# Altium PCB PCB.PcbDoc (part 2 of 4)
Units mm, origin at the board's own origin, x right, y up, seen from the top; angles counter-clockwise.
Board outline 86.25 x 140 mm, 4 copper layers (Top Layer, GND, PWR, Bottom Layer), stack 1.57 mm thick; 308 components, 255 nets, 1064 pads, 1223 vias.
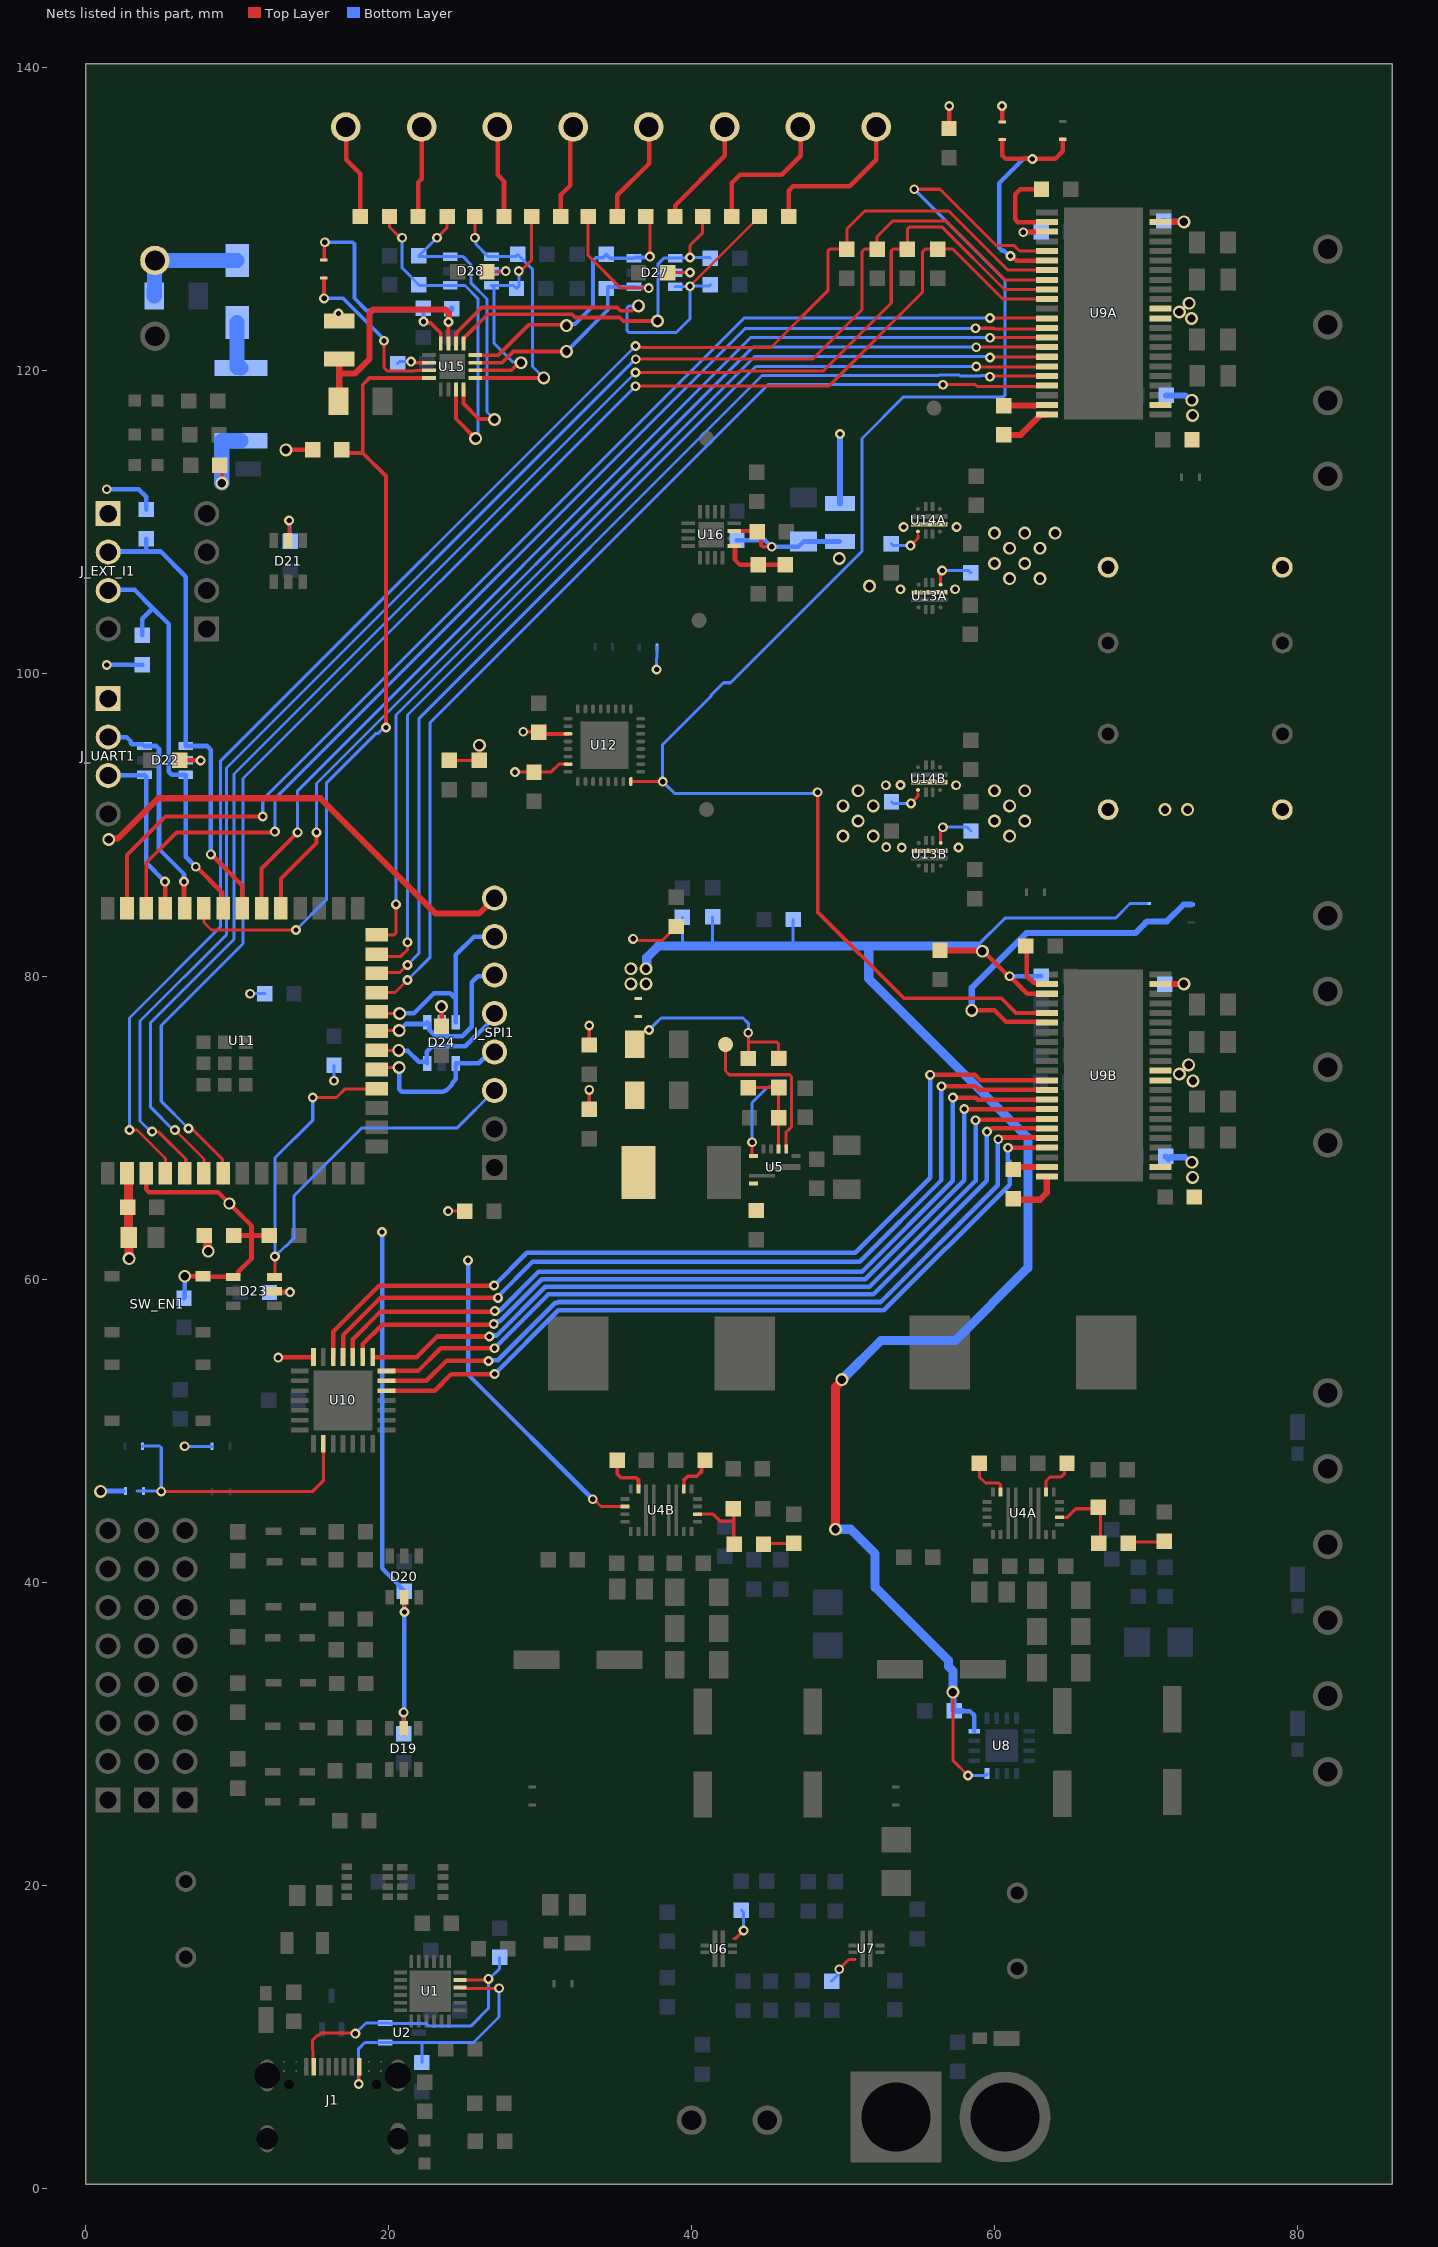
[diagram p4: the nets of this part, all layers, seen from the top]

## Part data
C1 C2 C9A C9B: library part C_10uF_25V, "Ceramic capacitor", Dielectric=X5R, Tolerance=10%, Voltage=25V, Casing=0805, Technology=Ceramic
C3 C31 C35A C35B C38A C38B C39 C47 C52 C53 C60 C61 C62 C66 C68 C69: library part C_1uF_10V, "Ceramic capacitor", Dielectric=X7R, Tolerance=10%, Voltage=10V, Casing=0603, Technology=Ceramic
C4 C19 C40 C41 C46 C63 C64 C67 C*3: library part C_100nF_10V, "Ceramic capacitor", Dielectric=X7R, Tolerance=10%, Voltage=10V, Casing=0603, Technology=Ceramic
C5 C6A C6B C7A C7B C22 C37A C37B C43 C44 C48 C49 C50 C51: library part C_100nF_25V, "Ceramic capacitor", Dielectric=X7R, Tolerance=10%, Voltage=25V, Casing=0603, Technology=Ceramic
C8A C8B C16A C16B C17A C17B: library part C_Pol_100uF_25V, "Aluminum Organic Polymer Capacitors 25Vol 100uF SMD 2KHr ESR=36 mOhms AECQ200", Manufacturer=KEMET, Tolerance=20%, Voltage=25V, ComponentLink1Description=Datasheet, ComponentLink1URL=https://yageogroup.com/content/datasheet/asset/file/KEM_A4088_A768, ComponentLink2Description=Supplier, ComponentLink2URL=https://www.digikey.pl/pl/products/detail/kemet/A768EB107M1ELAS036/13420071
C10A C10B C13A C13B C33A C33B C54A C54B C57A C57B: library part C_1uF_25V, "Ceramic capacitor", Dielectric=XR7, Tolerance=10%, Voltage=25V, Casing=0603, Technology=Ceramic
C11A C11B: library part C_220nF_25V, "Ceramic capacitor", Dielectric=XR7, Tolerance=10%, Voltage=25V, Casing=0603, Technology=Ceramic
C12A C12B C14A C14B C15A C15B C21 C30: library part C_22uF_25V, "Ceramic capacitor", Dielectric=X7R, Tolerance=20%, Voltage=25V, Casing=1206, Technology=Ceramic
C18A C18B C*2A C*2B: library part C_4u7_16V, "Ceramic capacitor", Dielectric=X5R, Tolerance=10%, Voltage=16V, Casing=0603, Technology=Ceramic
C20 C*1A C*1B: library part C_120pF_10V, "Ceramic capacitor", Dielectric=XR7, Tolerance=10%, Voltage=10V, Casing=0603, Technology=Ceramic
C23 C24 C59 C65: library part C_22uF_10V, "Ceramic capacitor", Dielectric=X5R, Tolerance=20%, Voltage=10V, Casing=1206, Technology=Ceramic
C25 C32A C32B C42 C56A C56B: library part C_Pol_470uF_35V, "470 µF 35 V Aluminum Electrolytic Capacitors Radial, Can 2000 Hrs @ 105°C", Manufacturer=Rubycon, Tolerance=20%, Voltage=35V
C26 C27 C28 C29: library part C_22nF_25V, "Ceramic capacitor", Dielectric=X5R, Tolerance=10%, Voltage=25V, Casing=0603, Technology=Ceramic
C34A C34B C36A C36B: library part Cap_10nF, "Ceramic capacitor", Dielectric=X7R, Tolerance=5%, Voltage=35V, Casing=0603
C45: library part C_10uF_10V, "Ceramic capacitor", Dielectric=X5R, Tolerance=10%, Voltage=10V, Casing=0805, Technology=Ceramic
C55A C55B C58A C58B: library part C_3n3F_25V, "Ceramic capacitor", Dielectric=XR7, Tolerance=10%, Voltage=25V, Casing=0603, Technology=Ceramic
D1 D2 D6 D7 D8 D9 D10: library part TVS_22V, "22V Breakdown MSMP20A-M3/89A", ComponentLink1Description=Datasheet, ComponentLink1URL=https://www.bourns.com/docs/product-datasheets/smbj.pdf, ComponentLink2Description=Supplier, ComponentLink2URL=https://www.mouser.pl/ProductDetail/Bourns/SMBJ22A?qs=%252Bf8Cd6aE5bxYX21zv65pDQ%3D%3D
D3 D4 D25 D26: library part LED_0603, "LED RED 0603 3.3V", Casing=0603, Color=RED
D5: library part "D schottky 1.5A", "Schottky Diode 1500mA 30V reverse", Reverse standoff voltage=20V, Casing="SMA (DO-214AC)", VFm=380mV@1000mA
D11 D12 D13 D14 D15 D16 D17 D18: library part "D schottky 200mA", "Schottky Diode 200mA 30V reverse", Power=150mW, Reverse standoff voltage=30V, Casing=SOD-323, VFm=280mV@10mA
D19 D20: "Very low capacitance ESD protection", Manufacturer_Name=STMicroelectronics, Copyright="Copyright (C) 2025 Ultra Librarian. All rights reserved.", Manufacturer_Part_Number=USBLC6-4SC6, RefDes=RefDes, Type=Type
D21 D22 D23 D24 D27 D28: "Very low capacitance ESD protection", Manufacturer=STMicroelectronics, Manufacturer_Part_Number=USBLC6-4SC6
EN_VREG1 EN_VREG2 JP1A JP1B JP2A JP2B JP3 JP4 JP5 JP6 JP7 OUT_1 OUT_PD1 PWM_1 PWM_2 PWM_3 PWM_REG1: library part "Jumper x2", "Jumper on traces"
F1: library part "PTC 1.1A FUSE", "FUSE PTC 1.1A 8VDC 2.2A TRIP"
F_ST1 F_USB1 F_XT1: library part F_7A, "7A fuse 0603 package", Current=7A, Manufacturer="Bel fuse Inc."
FB1A FB1B FB2A FB2B FB3A FB3B FB4A FB4B: library part FerriteBead_8A5, "Ferrite bead", Manufacturer="Bourns Inc."
J1: "USB - C connector  16 pin, 100W, famale paraller to board", Manufacturer="Global Connector Technology", Power=100W, Manufacturer_Part_Number=USB4105-GF-A-120.
J_1 J_EXT_2 J_IN_1 J_IN_2 J_IN_3 J_IN_4 J_SUP1 J_VREG1 J_VREG2 OUT_A1A OUT_A1B OUT_B1A OUT_B1B: library part "Screw Terminal x2 5mm", "Screw terminal x2 5mm spacing", Manufacturer="Same Sky", MP=TB001-500-02BE
J_EXT_1: library part XT60, "XT60 male connector, ewentualnie dostępny w zasobach prywatnych (5szt)", Manufacturer=AMASS
J_EXT_I1 J_MISC1 J_UART1: library part Goldpin_array_4, "Goldpin Male 4"
J_PWM_GND1 J_PWM_S1 J_PWM_VSUP1 J_SPI1: library part Goldpin_array_8, "Goldpin Male 8"
L1A L1B: library part L_4u7_10.5A, "Inductor, 4.7 uF , 10A", Manufacturer="Bourns Inc.", Tolerance=20%, IDC=10A
L2 L3: library part L_1mH, "Inductor", Tolerance=20%, Casing=1007, IDC=15mA
L_1: library part L_2u2_4.76A_1, "Inductor, 2.2uF 4.76A", Manufacturer="EATON ELECTRONICS", Tolerance=20%, ComponentLink1Description=Datasheet, ComponentLink1URL=https://www.eaton.com/content/dam/eaton/products/electronic-components/resources/data-sheet/eaton-dr-high-power-density-high-efficiency-shielded-drum-core-power-inductors-data-sheet.pdf, ComponentLink2Description=Supplier, ComponentLink2URL=https://www.digikey.pl/pl/products/detail/eaton-electronics-division/DR74-2R2-R/667219, IDC=7.06A
Q1 Q2: library part NMOS_DMG7430LFG, "DMG7430LFG, N-mosfet", Manufacturer="Diodes Incorporated", Casing=8-PowerVDFN
R1: library part R_27R, "Resistor", Power=100mW, Tolerance=1%, Casing=0603
R2 R18 R23: library part R_604R, "Resistor", Power=100mW, Tolerance=1%, Casing=0603
R3: library part R_NTC_10k_25C, "NTC Thermistor, 10k", Tolerance=1%, Casing=0603
R4 R5 R12 R51 R52: library part R_1k, "Resistor", Power=100mW, Tolerance=1%, Casing=0603
R6 R11 R13 R28A R28B R29 R38 R39 R40 R41 R42 R43 R44 R45 R50 R53 R54 R57 R74 R75 R76: library part R_10k, "Resistor", Power=100mW, Tolerance=1%, Casing=0603
R7A R7B R16 R20: library part R_100k, "Resistor", Power=100mW, Tolerance=1%, Casing=0603
R8A R8B R9A R9B: library part R_10R, Power=100mW, Tolerance=1%, Casing=0603
R10 R*2A R*2B: library part R_48k7, "Resistor", Power=100mW, Tolerance=1%, Casing=0603
R14 R19: library part R_470k, "Resistor", Power=100mW, Tolerance=1%, Casing=0603
R15 R21: library part R_169k, "Resistor", Power=100mW, Tolerance=1%, Casing=0603
R17 R22: library part R_100R, "Resistor", Power=100mW, Tolerance=1%, Casing=0603
R24A R24B R25A R25B R26A R26B R27A R27B R46 R47: library part R_3k09, "Resistor", Power=100mW, Tolerance=1%, Casing=0603
R30 R31 R32 R33 R34 R35 R36 R37: library part R_220R, "Resistor", Power=100mW, Tolerance=1%, Casing=0603
R48 R49 R_CC2 RCC1: library part R_5k1, "Resistor", Power=100mW, Tolerance=1%, Casing=0603
R55A R55B R56A R56B: library part R_549, Power=100mW, Tolerance=1%, Casing=0603
R58 R59 R60 R61 R70 R71 R72 R73: library part R_51k_LT, Power=100mW, Tolerance=0.1%, Casing=0603
R62 R63 R64 R65 R66 R67 R68 R69: library part R_10k_LT, Power=125mW, Tolerance=0.1%, Casing=0603
R*1A R*1B: library part R_27k4, "Resistor", Power=100mW, Tolerance=1%, Casing=0603
R_S1A R_S1B R_S2: library part R_10mR, "Shunt Resistor 10 mR, 1206, 250mW", Power=250mW, Tolerance=1%, Casing=1206
R_SUSB1: library part R_5mR, "Shunt Resistor 5mR, 0805", Power=500mW, Tolerance=1%, Casing=0805
SW_EN1 SW_IO1: library part Button, "NO button", Manufacturer="C&K Components", Manufacturer_Part_Number="PTS526 SM15 SMTR2 LFS"
U1: "USB_C PD controller", Manufacturer="Diodes Inc", Manufacturer_Part_Number=AP33772SDKZ-13
U2 U3: "Dual 1.5-pF, 5.5-V, ±25-kV  ESD protection diode with 5.5-A 8/20-uS surge rating  for USB 2.0 3-SC70", Manufacturer="Texas Instruments", Manufacturer_Part_Number=TPD2E2U06DCKR
U4A U4B: "30-V, 8-A buck-boost converter with I2C interface", Manufacturer="Texas Instruments", ComponentLink1Description=Datasheet, ComponentLink1URL=https://www.ti.com/lit/ds/symlink/tps55289.pdf, ComponentLink2Description=Supplier, ComponentLink2URL=https://www.digikey.pl/pl/products/detail/texas-instruments/TPS55289RYQR/16928303?s=N4IgTCBcDaIC4AcDOBWFYAcBOASgTwEcAnEAXQF8g, ComponentLink3Description=Supplier, ComponentLink3URL=https://www.mouser.pl/ProductDetail/Texas-Instruments/TPS55289RYQR?qs=T%252BzbugeAwjhgaIN94Lbpjg%3D%3D&utm_id=20109199562&utm_source=google&utm_medium=cpc&utm_marketing_tactic=emeacorp, Manufacturer_Part_Number=TPS55289RYQR
U5: "Switching Voltage Regulators 4.5-V to 28-V input 8-A synchronous buck", Manufacturer="Texas Instruments", Manufacturer_Part_Number=TPS56837RPAR
U6 U7: "2.7-V to 23-V, 5.5-A eFuse with integrated reverse polarity protection 10-VQFN-HR", Manufacturer="Texas Instruments", Manufacturer_Part_Number=TPS259474LRPWR
U8: "26V, triple channel, 13-bit, i2c output current/voltage monitor w/alerts 16-VQFN", Manufacturer="Texas Instruments", Datasheet=https://www.ti.com/lit/gpn/ina3221, Manufacturer_Part_Number=INA3221AIRGVR
U9A U9B: library part IC_drv8962_PDRV8962DDWR, "65-V four-channel half-bridge driver with current sense outputs 44-HTSSOP", Manufacturer="Texas Instruments", Manufacturer_Part_Number=DRV8962DDWR
U11: "Bluetooth, WiFi 802.11b/g/n, Bluetooth v5.0 Transceiver Module 2.4GHz Antenna Not Included, U.FL Surface Mount", Package=None, Availability=Unavailable, Check_prices=https://www.snapeda.com/parts/ESP32-S3-WROOM-1U-N16R8/Espressif+Systems/view-part/?ref=eda, MF="Espressif Systems", MP=ESP32-S3-WROOM-1U-N16R8, Price=None, SnapEDA_Link=https://www.snapeda.com/parts/ESP32-S3-WROOM-1U-N16R8/Espressif+Systems/view-part/?ref=snap
U12: library part IC_tca6424a_TCA6424ARGJR, "24-bit translating 1.65- to 5.5-V I2C/SMBus I/O expander with interrupt, reset & config registers 32-UQFN -40 to 85", Manufacturer="Texas Instruments", Manufacturer_Part_Number=TCA6424ARGJR, PackageReference=RGJ0032A, PartNumber=TCA6424ARGJR
U13A U13B U14A U14B: "Ideal diode ORing controller 5.5A 23V", Manufacturer="Texas Instruments"
U15: library part IC_ads7128_ADS7128IRTER, "Small 8-ch 12-bit analog-to-digital converter (ADC) with I2C interface, GPIOs, CRC and RMS module 16-WQFN -40 to 85", Manufacturer_Name="Texas Instruments", Copyright="Copyright (C) 2026 Ultra Librarian. All rights reserved.", Datasheet=https://www.ti.com/lit/gpn/ads7128, Manufacturer_Part_Number=ADS7128IRTER, RefDes=RefDes, Type="Data Acquisition"
U16: "DAC53202RTER", Manufacturer="Texas Instruments"

## Via types
v1: diameter 0.85, hole 0.55, Top Layer to Bottom Layer, tented both sides, 772 vias
v2: diameter 0.65, hole 0.35, Top Layer to Bottom Layer, tented both sides, 362 vias
v3: diameter 0.65, hole 0.35, Top Layer to Bottom Layer, tented bottom, 26 vias
v4: diameter 0.7, hole 0.4, Top Layer to Bottom Layer, tented both sides, 25 vias
v5: diameter 0.65, hole 0.35, Top Layer to Bottom Layer, tented top, 19 vias
v6: diameter 0.85, hole 0.55, Top Layer to Bottom Layer, tented bottom, 14 vias
v7: diameter 5, hole 4.5, Top Layer to Bottom Layer, 4 vias
v8: diameter 0.8, hole 0.5, Top Layer to Bottom Layer, tented both sides, 1 vias

## Nets (pads, with @x,y where several pads share a name; then routed paths per layer and width w, separated by ;. In a path a pad name is that pad's centre, name@x,y a point inside that pad or via, vN(x,y) a via of type N, cw(c..) or ccw(c..) an arc to the next point about the centre after c; other vN are vias at no path point)
3V3PROT: C30.2 D5.K J_1.1 J_EXT_I1.1 J_SPI1.8 J_UART1.1 R48.2 R49.2 | length 44
  Top Layer w0.4: v1(1.537,89.029) 1.591,89.083 2.133,89.083 4.8,91.75 15.5,91.75 23.119,84.131 25.971,84.131 J_SPI1.8@27,85.16
  Bottom Layer w0.3: v2(1.4,100.55) 1.425,100.575 R49.2@3.75,100.575 ; v2(1.4,112.15) 3.5,112.15 4,111.65 R48.2@4,110.812
  Bottom Layer w1: C30.2@4.539,124.906 4.539,125.282 4.563,125.306 4.563,127.25 J_1.1@4.581,127.25 D5.K@10,127.25
3V5: C31.2 C35A.2 C35B.2 C40.2 C41.2 C44.2 C45.2 C46.2 C48.2 C49.2 C50.2 C52.2 C53.2 C60.2 C63.2 C64.2 D6.K D19.5 D20.5 D21.5 D22.5 D23.5 D24.5 D27.5 D28.5 F1.2 JP1A.1 JP1B.1 JP3.2 L2.1 L3.1 OUT_1.2 PWM_1.1 PWM_2.2 R7A.2 R7B.2 R12.2 R16.2 R20.2 R28A.1 R28B.1 R29.2 R46.2 R47.2 R50.2 R53.2 R54.2 R57.2 R75.1 R76.2 U4B.2 U8.4 U8.16 U9A.25 U9B.25 U10.21 U11.2 U12.27 U12.31 U15.10 | length 252.6
  Top Layer w0.2: R12.2@8.675,113.75 9,113.425 v1(9,112.55) ; D21.5@13.375,108.762 13.439,108.827 v2(13.439,110.082) ; D19.5@21,30.362 v2(21,31.413) ; D20.5@21.04,39.018 21.046,39.012 21.046,38.048 v2(21.052,38.042) ; v2(23.938,64.5) R29.2@25.038,64.5 ; R54.2@24,94.25 R53.2@26,94.25 ; C64.2@26.5,126.5 27.691,126.5 v5(27.738,126.546) ; v2(28.35,93.475) C53.2@29.6,93.475 29.625,93.5 30.75,93.5 31.25,94 U12.31@31.85,94 ; R16.2@33.25,71.212 v2(33.25,72.505) ; R20.2@33.25,75.462 v2(33.25,76.75) ; v2(33.485,45.485) 33.541,45.485 34.025,45 U4B.2@35.6,45 ; v2(36.149,82.47) 36.235,82.384 36.483,82.384 36.492,82.376 38.088,82.376 R76.2@39,83.288 ; C63.2@38.425,126.45 v3(39.9,126.45) ; v1(57.25,32.75) 57.25,28.25 v2(58.25,27.25)
  Top Layer w0.25: v2(21.49,120.573) 21.56,120.502 22.677,120.502 U15.10@22.679,120.5 ; v2(28.893,96.144) 29.882,96.144 30.026,96 U12.27@31.85,96
  Top Layer w0.3: U11.2@2.735,67 U11.2@2.85,66.885 ; C48.2@6.212,94.254 6.216,94.25 v2(7.6,94.25) ; D23.5@12.475,59.2 12.5,59.175 13.475,59.175 v2(13.5,59.15) ; v2(12.725,54.826) 12.766,54.867 U10.21@15.05,54.867 ; v1(13.225,114.75) R57.2@15,114.75 ; C50.2@23.496,76.712 23.5,76.716 v1(23.5,77.998) ; R53.2@26,94.25 v1(26,95.25) ; R28A.1@57,135.962 57.016,135.978 v2(57.016,137.451) ; v1(59.2,81.65) 59.275,81.65 60.925,80 v2(61,80) 62.152,78.848 U9B.25@63.45,78.848 ; v2(60.5,137.45) 60.513,137.438 JP1A.1@60.513,136.45 ; v2(61.9,129.108) 61.92,129.128 63.43,129.128 U9A.25@63.45,129.148
  Top Layer w0.4: v2(16.7,123.75) 16.7,123.1 L2.1@16.75,123.05 ; R28B.1@56.4,81.712 59.138,81.712 v1(59.2,81.65)
  Top Layer w0.6: U11.2@2.85,66.885 C45.2@2.85,62.75 2.863,62.737 2.863,61.378 v1(2.876,61.364) ; R50.2@7.85,62.89 8.05,62.69 8.05,61.898 v1(8.098,61.85) ; v1(49.5,43.5) 49.5,52.882 49.925,53.307 v1(49.925,53.375)
  Bottom Layer w0.2: v2(6.541,48.975) PWM_1.1@8.35,48.975 ; v2(10.867,78.85) R47.2@11.838,78.85 ; C44.2@13.504,108.712 v2@13.504,110.146 ; v2(16.4,73.102) R46.2@16.4,74.125 ; C60.2@20.6,120.45 20.723,120.573 v2(21.49,120.573) ; D28.5@26.8,126.55 26.802,126.548 v5(27.738,126.546) v5(27.738,126.546) ; v2(37.7,100.25) 37.7,101.004 37.725,101.029 JP3.2@37.725,101.725 ; D27.5@38.925,126.45 v3(39.9,126.45) ; 39.3,81.993 39.4,82.093 R7B.2@39.4,83.888 ; 41.4,81.993 R7A.2@41.4,83.925 ; R75.1@46.712,83.75 46.712,82.031 46.75,81.993 ; v2(58.25,27.25) 59.452,27.25 59.504,27.303 U8.16@59.504,27.379 ; v1(59.2,81.65) 58.857,81.993 58.857,82.007 60.7,83.85 68,83.85 68.95,84.8 JP1B.1@70.025,84.8
  Bottom Layer w0.3: v1(1,46) 1.025,46.025 2.475,46.025 ; D22.5@6.612,94.25 v2(7.6,94.25) ; C49.2@12.145,59.129 13.279,59.129 13.3,59.15 v2(13.5,59.15) ; v2(19.575,63.124) 19.575,40.925 20.678,39.822 20.678,39.776 21.052,39.402 v2(21.052,38.042) 21.026,38.016 21.026,31.439 v2(21,31.413) C40.2@21,30 ; D24.5@23.5,76.975 v1(23.5,77.998) ; v2(25.25,61.25) 25.25,53.719 v2(33.485,45.485) ; v1(49.925,53.375) v1@50,53.45 ; 57.902,31.5 58.383,31.5 58.654,31.229 U8.4@58.654,30.179 ; v2(61,80) C35B.2@63.075,80 ; v2(61.9,129.108) 63.033,129.108 C35A.2@63.075,129.15
  Bottom Layer w0.4: L3.1@49.8,111.2 v2(49.8,115.8) ; v1(57.25,32.75) 57.291,32.709 57.291,31.563 57.353,31.5 57.902,31.5
  Bottom Layer w0.6: v1(37,80.5) 37.048,80.548 37.048,81.236 37.805,81.993 39.3,81.993 41.4,81.993 46.75,81.993 51.7,81.993 ; v1(49.5,43.5) 50.5,43.5 52.125,41.875 52.125,39.675 56.952,34.848 56.952,34.452 57.25,34.154 v1(57.25,32.75) ; v1@50,53.45 52.5,55.95 57.4,55.95 62.2,60.75 62.2,69.35 51.7,79.85 51.7,81.993 ; 58.857,81.993 51.7,81.993 ; v1(59.2,81.65) v1@59.2,81.718
  Bottom Layer w1: v1@8.988,112.562 D6.K@8.988,113.5 8.988,115.313 9.025,115.35 F1.2@10.25,115.35
  other v1: 36,79.5 37,79.5 36,80.5
3V5_F: D5.A F1.1 | length 3.2
  Bottom Layer w1: D5.A@10,123.15 10,120.175 10.225,120.175 F1.1@10.25,120.15
3V5_ILTER_ADC: C59.2 C61.2 L2.2 U15.7 | length 16.9
  Top Layer w0.25: v5@23.94,123.11 23.948,123.102 23.948,121.773 U15.7@23.95,121.771
  Top Layer w0.4: C59.2@16.7,117.95 16.75,118 16.75,119.8 ; L2.2@16.75,120.95 16.75,119.8 ; v5@23.94,123.11 23.988,123.158 23.988,123.766 23.753,124 18.984,124 18.75,123.766 18.75,120.75 17.8,119.8 16.75,119.8
  Bottom Layer w0.4: v5@23.94,123.11 23.988,123.158 23.988,123.894 C61.2@24.169,124.075
  other v5: 23.965,123.185
3V5_OUT: C20.2 C23.2 C24.2 L_1.2 OUT_1.1 R10.2 | length 12.4
  Top Layer w0.2: R10.2@43.75,74.575 43.75,75.65 ; v2(43.75,76.275) 43.75,75.65 ; C20.2@45.75,74.575 45.75,75.533 45.633,75.65 43.75,75.65
  Bottom Layer w0.2: v2(37.2,76.45) 37.2,76.466 37.634,76.9 37.984,77.25 43.4,77.25 43.75,76.9 v2(43.75,76.275)
3V5FILTER_DAC: C65.2 C66.2 L3.2 R74.2 U16.15 | length 10.2
  Top Layer w0.25: U16.15@42.821,109.4 C66.2@44.084,109.4 ; C66.2@44.284,109.4 44.583,109.101 44.583,108.467 44.7,108.35 v2(45.3,108.35)
  Bottom Layer w0.3: R74.2@43,108.788 44.854,108.788 45.291,108.35 v2(45.3,108.35) 47.05,108.35 C65.2@47.4,108.7 L3.2@49.8,108.7
A4: PWM_2.1 PWM_3.2 U10.2 | length 19.2
  Top Layer w0.2: v2(5,46) 15,46 15.7,46.7 U10.2@15.7,49.133
  Bottom Layer w0.2: 3.4,46.013 4.987,46.013 v2(5,46) 5,48.883 4.883,49 3.775,49 PWM_3.2@3.775,48.975
ADDR: JP5.1 U15.11 | length 11.4
  Top Layer w0.2: JP5.1@15.725,126.1 JP5.1@15.737,126.1 ; v2@15.737,124.762 v2(15.75,124.75) ; v2(19.7,121.95) 19.7,120.165 19.917,119.948 21.729,119.948 21.781,120 U15.11@22.679,120
  Top Layer w0.25: v2@15.737,124.762 JP5.1@15.737,126.1
  Bottom Layer w0.25: v2(15.75,124.75) 17,124.75 19.7,122.05 v2(19.7,121.95)
ADS_ALERT: R57.1 U11.35 U15.12 | length 52.5
  Top Layer w0.2: U11.35@7.815,84.5 7.815,83.551 8.316,83.05 v2(13.9,83.05)
  Top Layer w0.25: R57.1@16.925,114.75 17.125,114.55 18.3,114.55 ; v3(19.829,96.421) 19.829,113.021 18.3,114.55 ; U15.12@22.679,119.5 18.75,119.5 18.3,119.05 18.3,114.55
  Bottom Layer w0.2: v2(13.9,83.05) 15.9,85.05 15.9,92.75 19.187,96.037 19.329,96.037 19.712,96.421 v3(19.829,96.421)
AIN0: J_IN_1.2 R61.2 | length 6.4
  Top Layer w0.3: J_IN_1.2@17.2,136.15 17.2,133.9 18.138,132.962 R61.2@18.138,130.15
AIN0_DIV: D28.1 R61.1 R65.1 U15.15 | length 22.7
  Top Layer w0.2: R61.1@20.062,130.15 20.069,130.143 20.069,129.459 20.778,128.75 v5(20.9,128.75)
  Top Layer w0.25: U15.15@24.45,118.729 24.45,116.8 v6(25.75,115.5)
  Bottom Layer w0.2: v5(20.9,128.75) 20.9,126.75 22.05,125.6 D28.1@24.075,125.6 25.045,125.6 25.9,124.745 25.9,115.772 25.75,115.622 v6(25.75,115.5)
AIN1: J_IN_1.1 R60.2 | length 6.1
  Top Layer w0.3: R60.2@21.95,130.15 21.95,132.4 22.2,132.65 J_IN_1.1@22.2,136.15
AIN1_DIV: D28.3 R60.1 R64.1 U15.16 | length 21.3
  Top Layer w0.2: v2(23.2,128.75) 23.875,129.425 R60.1@23.875,130.15
  Top Layer w0.25: U15.16@24.95,118.729 24.95,117.8 25.96,116.79 26.96,116.79 v6(27,116.75)
  Bottom Layer w0.2: v2(23.2,128.75) R64.1@22,127.55 22.05,127.5 24.925,127.5 25.438,126.987 25.438,125.773 26.5,124.711 26.5,117.25 v6(27,116.75)
AIN2: J_IN_2.2 R59.2 | length 6.2
  Top Layer w0.3: J_IN_2.2@27.2,136.15 27.2,132.9 27.625,132.475 R59.2@27.625,130.15
AIN2_DIV: D28.4 R59.1 R63.1 U15.1 | length 18.4
  Top Layer w0.2: v2(25.7,128.75) R59.1@25.7,130.15
  Top Layer w0.25: U15.1@25.721,119.5 28.281,119.5 v6(30.25,119.5)
  Bottom Layer w0.2: v2(25.7,128.75) 25.786,128.664 25.786,128.307 26.593,127.5 D28.4@26.8,127.5 28.375,127.5 R63.1@28.525,127.65 29.5,126.675 29.5,120.25 v6(30.25,119.5)
AIN3: J_IN_2.1 R58.2 | length 6.3
  Top Layer w0.3: R58.2@31.375,130.15 31.375,131.575 32,132.2 32,135.95 J_IN_2.1@32.2,136.15
AIN3_DIV: D28.6 R58.1 R62.1 U15.2 | length 16.4
  Top Layer w0.2: v5(28.6,126.55) 28.722,126.55 29.45,127.278 R58.1@29.45,130.15
  Top Layer w0.25: U15.2@25.721,120 28.119,120 28.619,120.5 v6(28.75,120.5)
  Bottom Layer w0.2: v5(28.6,126.55) 28.6,125.55 R62.1@28.45,125.4 28.25,125.6 D28.6@26.8,125.6 26.975,125.425 26.975,121.775 28.187,120.563 28.687,120.563 v6(28.75,120.5)
AIN4: J_IN_3.2 R70.2 | length 6.9
  Top Layer w0.3: R70.2@35.1,130.15 35.1,131.55 37.2,133.65 J_IN_3.2@37.2,136.15
AIN4_DIV: D27.1 R69.1 R70.1 U15.3 | length 21.9
  Top Layer w0.2: R70.1@33.175,130.15 33.175,127.575 35.325,125.425 v5(37.177,125.425)
  Top Layer w0.25: U15.3@25.721,120.5 27.5,120.5 28.25,121.25 v6(31.75,121.25)
  Bottom Layer w0.25: v6(31.75,121.25) 34.475,123.975 34.475,125.5 D27.1@36.2,125.5 36.237,125.462 37.139,125.462 v5(37.177,125.425)
AIN5: J_IN_3.1 R71.2 | length 7.4
  Top Layer w0.3: R71.2@38.912,130.15 38.912,130.862 42.2,134.15 J_IN_3.1@42.2,136.15
AIN5_DIV: D27.3 R68.1 R71.1 U15.4 | length 19
  Top Layer w0.2: R71.1@36.988,130.15 37.25,129.888 v2(37.25,127.5)
  Top Layer w0.25: U15.4@25.721,121 27.25,121 29.25,123 31.7,123 v6(31.75,122.95)
  Bottom Layer w0.25: v6(31.75,122.95) 31.863,123.063 32.313,123.063 33.5,124.25 33.5,127.25 33.684,127.434 34.159,127.434 R68.1@34.375,127.65 34.625,127.4 D27.3@36.2,127.4 36.25,127.45 37.2,127.45 v2(37.25,127.5)
AIN6: J_IN_4.2 R72.2 | length 9.5
  Top Layer w0.3: R72.2@42.662,130.15 42.662,132.362 43.2,132.9 45.95,132.9 47.2,134.15 J_IN_4.2@47.2,136.15
AIN6_DIV: D27.4 R67.1 R72.1 U15.5 | length 24.5
  Top Layer w0.2: v2(39.9,127.45) 39.9,128.25 40.738,129.088 R72.1@40.738,130.15
  Top Layer w0.25: U15.5@24.95,121.771 24.95,122.097 26.553,123.7 32.111,123.7 32.329,123.482 35.268,123.482 35.5,123.25 v6(37.75,123.25)
  Bottom Layer w0.2: v6(37.75,123.25) 37.802,123.302 37.802,127.033 38.169,127.4 D27.4@38.925,127.4 38.95,127.425 39.875,127.425 v2(39.9,127.45) ; v2@39.912,127.438 39.925,127.45 41.2,127.45 R67.1@41.25,127.4
AIN7: J_IN_4.1 R73.2 | length 10.6
  Top Layer w0.3: R73.2@46.412,130.15 46.412,131.862 46.7,132.15 50.45,132.15 52.2,133.9 J_IN_4.1@52.2,136.15
AIN7_DIV: D27.6 R66.1 R73.1 U15.6 | length 31.6
  Top Layer w0.2: v2(39.9,125.55) 39.9,125.562 R73.1@44.488,130.15
  Top Layer w0.25: U15.6@24.45,121.771 24.452,121.773 24.452,122.45 26.153,124.15 35.097,124.15 35.315,123.932 36.054,123.932 36.372,124.25 v6(36.5,124.25)
  Bottom Layer w0.2: v6(36.5,124.25) 35.867,124.25 35.75,124.133 35.75,122.617 35.867,122.5 39,122.5 39.9,123.4 v2(39.9,125.55) ; D27.6@38.925,125.5 38.95,125.525 39.875,125.525 v2(39.9,125.55) ; R66.1@41.25,125.65 41.15,125.55 v2(39.9,125.55)
BOOT1A: C6A.1 U4A.20 | length 3
  Top Layer w0.2: C6A.1@59,47.85 59,46.95 59.4,46.55 60.283,46.55 60.4,46.433 U4A.20@60.4,45.95
BOOT1B: C6B.1 U4B.20 | length 3.1
  Top Layer w0.25: C6B.1@35.1,48.05 35.1,47.15 35.35,46.9 36.354,46.9 36.5,46.754 U4B.20@36.5,46.15
BOOT2A: C7A.1 U4A.19 | length 2.9
  Top Layer w0.2: U4A.19@63.4,45.95 63.4,46.683 63.667,46.95 64.4,46.95 64.609,47.159 64.609,47.668 C7A.1@64.787,47.846
BOOT2B: C7B.1 U4B.19 | length 2.8
  Top Layer w0.2: U4B.19@39.5,46.15 39.5,46.75
  Top Layer w0.25: 39.5,46.75 39.75,47 40.35,47 40.659,47.31 40.659,47.818 C7B.1@40.887,48.046
C_BOOT: C19.2 U5.7
C_COMPA: C*2A.2 R*1A.1 | length 2.4
  Top Layer w0.2: R*1A.1@68.819,42.58 68.889,42.65 71.141,42.65 C*2A.2@71.204,42.713
C_COMPB: C*2B.2 R*1B.1 | length 3.5
  Top Layer w0.2: C*2B.2@46.75,42.575 46.724,42.575 46.723,42.574 46.342,42.56 R*1B.1@45.158,42.56 ; R*1B.1@44.75,42.5 R*1B.1@45.098,42.5 ; R*1B.1@44.75,42.5 R*1B.1@45.098,42.5 ; R*1B.1@44.75,42.5 R*1B.1@45.098,42.5 ; R*1B.1@44.75,42.5 R*1B.1@45.098,42.5 ; R*1B.1@44.75,42.5 R*1B.1@45.158,42.56 ; R*1B.1@45.098,42.5 R*1B.1@45.158,42.56
C_DVDDA: C38A.2 U9A.24 | length 5.7
  Top Layer w0.3: C38A.2@63.1,131.95 61.7,131.95 61.367,131.618 61.367,129.958 61.543,129.783 U9A.24@63.45,129.783
C_DVDDB: C38B.2 U9B.24 | length 3.5
  Top Layer w0.3: C38B.2@62.075,82 62.135,81.94 62.135,80.012 62.58,79.568 62.71,79.568 62.745,79.533 63.4,79.533 U9B.24@63.45,79.483
C_DVDT_AA: C55A.2 U13A.7 | length 2.9
  Top Layer w0.2: U13A.7@56.44,105.85 56.44,106.555 56.545,106.66 v2(56.545,106.782)
  Bottom Layer w0.2: v2(56.545,106.782) 58.296,106.782 C55A.2@58.44,106.638
C_DVDT_AB: C55B.2 U13B.7 | length 3.1
  Top Layer w0.2: U13B.7@56.45,88.8 56.45,89.576 56.592,89.717 v2(56.592,89.839)
  Bottom Layer w0.2: v2(56.592,89.839) 58.199,89.839 C55B.2@58.45,89.588
C_DVDT_BA: C58A.2 U14A.7 | length 2.2
  Top Layer w0.2: v2(54.461,108.425) 54.94,108.904 54.94,109.1
  Bottom Layer w0.2: C58A.2@53.194,108.562 53.331,108.425 v2(54.461,108.425)
C_DVDT_BB: C58B.2 U14B.7 | length 2.1
  Top Layer w0.2: v2(54.483,91.417) 54.95,91.883 54.95,92.05
  Bottom Layer w0.2: C58B.2@53.204,91.512 53.299,91.417 v2(54.483,91.417)
C_ITIMER_EXT: C28.2 U7.10 | length 2.3
  Top Layer w0.2: v2(49.75,14.462) 50.388,15.1 U7.10@50.8,15.1
  Bottom Layer w0.2: C28.2@49.25,13.675 49.658,14.083 49.658,14.248 49.75,14.34 v2(49.75,14.462)
C_ITIMER_USB: C26.2 U6.10 | length 2.3
  Top Layer w0.2: 42.8,16.5 42.924,16.5 v2(43.441,17.018) v2(43.441,17.018)
  Bottom Layer w0.2: C26.2@43.294,18.353 43.441,18.207 v2(43.441,17.018)
C_SS: C*3.2 U5.5 | length 5.8
  Top Layer w0.2: v2@44,69.15 44,68.155 44.025,68.13 U5.5@44.1,68.13
  Bottom Layer w0.2: v2@44,69.15 44,71.65 45.038,72.688 C*3.2@45.746,72.688
  other v2: 44,69.05
CAP: C68.2 C69.2 U16.13 | length 4.4
  Top Layer w0.3: U16.13@42.871,108.377 42.871,107.482 43.203,107.15 C68.2@44.396,107.15 ; C68.2@44.396,107.162 44.409,107.15 C69.2@46.196,107.15
CC1: J1.A5 RCC1.2 U1.17 U2.2 | length 20.1
  Top Layer w0.2: J1.A5@15.063,8.027 15.015,8.075 15.015,9.101 14.967,9.149 14.967,9.751 15.334,10.117 15.437,10.117 15.569,10.25 17.77,10.25 v2(17.81,10.21) ; U1.17@24.715,13.75 26.525,13.75 v2(26.6,13.825)
  Bottom Layer w0.2: v2(17.81,10.21) 18.516,10.915 20.07,10.915 20.095,10.89 22.469,10.89 22.66,10.7 25.426,10.7 26.6,11.874 v2(26.6,13.825) ; v2@26.6,13.777 27.335,14.512 RCC1.2@27.335,15.238
CC2: J1.B5 R_CC2.2 U1.16 U2.1 | length 19.4
  Top Layer w0.2: v2(18.034,6.885) 18.048,6.9 18.048,8.013 J1.B5@18.063,8.027 ; U1.16@24.715,13.25 24.743,13.223 25.138,13.223 25.161,13.2 v2(27.3,13.2)
  Bottom Layer w0.2: v2(18.034,6.885) 18.034,9.216 18.433,9.615 U2.1@19.795,9.615 22.2,9.615 25.615,9.615 27.3,11.3 v2(27.3,13.2) ; R_CC2.2@22.2,8.3 22.2,9.588
CHIP_PU: C47.2 C51.2 D23.1 R50.1 SW_EN1.3 U11.3 | length 20.1
  Top Layer w0.3: U11.3@4.005,67 4.005,65.935 4.181,65.76 8.74,65.76 10.957,63.543 10.957,62.89 ; v1(6.55,60.2) SW_EN1.3@7.75,60.2 7.775,60.175 9.725,60.175 D23.1@9.75,60.15 9.957,60.15 10.086,60.279 10.086,60.486 10.957,61.357 10.957,62.89 ; R50.1@9.775,62.89 10.957,62.89 ; C47.2@12.138,62.89 10.957,62.89
  Bottom Layer w0.3: C51.2@6.5,58.75 6.55,58.8 v1(6.55,60.2)
  other v8: 9.5,65
COMPA: C*1A.2 R*1A.2 U4A.15 | length 5.3
  Top Layer w0.2: U4A.15@64.3,44.3 64.308,44.292 64.81,44.292 65.372,44.854 66.745,44.854 C*1A.2@66.838,44.946 67,44.784 67,42.686 R*1A.2@66.894,42.58
COMPB: C*1B.2 R*1B.2 U4B.15 | length 5
  Top Layer w0.2: U4B.15@40.4,44.5 41.427,44.5 41.889,44.038 42.788,44.038 ; C*1B.2@42.768,44.865 42.788,44.845 42.788,44.038 ; R*1B.2@42.825,42.5 42.788,42.538 42.788,44.038
CPHA: C37A.2 U9A.44 | length 3.5
  Top Layer w0.4: C37A.2@60.604,115.738 61.738,115.738 62.925,116.925 62.925,117.083 U9A.44@63.45,117.083
CPHB: C37B.2 U9B.44 | length 3.5
  Top Layer w0.3: C37B.2@61.25,65.325 C37B.2@61.325,65.25
  Top Layer w0.4: C37B.2@61.325,65.25 63,65.25 63.45,65.7 U9B.44@63.45,66.783
CPLA: C37A.1 U9A.43 | length 2.9
  Top Layer w0.4: C37A.1@60.604,117.662 61.964,117.662 61.984,117.683 62.773,117.683 62.808,117.718 U9A.43@63.45,117.718
CPLB: C37B.1 U9B.43 | length 2.3
  Top Layer w0.3: C37B.1@61.25,67.25 C37B.1@61.417,67.418
  Top Layer w0.4: C37B.1@61.417,67.418 U9B.43@63.45,67.418
DECAP: C62.2 JP5.2 U15.8 | length 14.7
  Top Layer w0.2: JP5.2@15.725,127.275 JP5.2@15.762,127.275 ; v2@15.762,128.412 v2(15.8,128.45)
  Top Layer w0.25: JP5.2@15.762,127.275 v2@15.762,128.412 ; v5@22.306,123.138 22.319,123.125 22.783,123.125 23.45,122.458 U15.8@23.45,121.771
  Bottom Layer w0.25: v2(15.8,128.45) 17.633,128.45 17.75,128.333 17.75,124.75 18.55,123.95 22.155,123.95 C62.2@22.295,124.089 ; v5@22.306,123.138 22.3,123.143 22.3,123.942 C62.2@22.31,123.951
  other v5: 22.306,123.213
DRV_1_EN1: U9A.37 U11.31 | length 69.1
  Top Layer w0.2: v2(58.8,121.526) 58.802,121.528 59.523,121.528 59.525,121.526 59.959,121.526 59.96,121.528 U9A.37@63.45,121.528
  Top Layer w0.25: U11.31@12.895,84.705 12.895,86.445 15.25,88.8 v3(15.25,89.5)
  Bottom Layer w0.2: v3(15.25,89.5) 15.25,92.725 44.077,121.552 58.774,121.552 v2(58.8,121.526)
DRV_1_EN2: U9A.36 U11.32 | length 70.4
  Top Layer w0.2: v2(59.7,122.151) 59.706,122.157 63.444,122.157 U9A.36@63.45,122.163
  Top Layer w0.25: U11.32@11.625,84.705 11.625,87.125 v3(14,89.5)
  Bottom Layer w0.2: v3(14,89.5) 14,92.25 43.901,122.151 v2(59.7,122.151)
DRV_1_EN3: U9A.35 U11.38 | length 78.4
  Top Layer w0.2: v2(58.75,122.776) 59.959,122.776 60.011,122.723 63.375,122.723 U9A.35@63.45,122.798
  Top Layer w0.25: U11.38@4.005,84.5 4.005,87.49 6,89.485 12.435,89.485 v3(12.5,89.55)
  Bottom Layer w0.2: v3(12.5,89.55) 12.5,91.723 43.527,122.75 58.724,122.75 v2(58.75,122.776)
DRV_1_EN4: U9A.34 U11.39 | length 79.6
  Top Layer w0.2: v2(59.7,123.45) 59.709,123.441 63.441,123.441 U9A.34@63.45,123.433
  Top Layer w0.25: U11.39@2.735,84.5 2.735,88.015 5.27,90.55 v3(11.7,90.55)
  Bottom Layer w0.2: v3(11.7,90.55) 11.7,91.669 43.481,123.45 v2(59.7,123.45)
DRV_1_IN1: U9A.41 U11.23 | length 70.1
  Top Layer w0.2: U11.23@19.225,78.925 20.425,78.925 v2(21.25,79.75) ; v2@56.663,118.988 v2(56.6,119.05) 58.737,119.05 58.85,118.937 U9A.41@63.45,118.937
  Bottom Layer w0.2: v2(21.25,79.75) 22.75,81.25 22.75,96.75 45.05,119.05 v2(56.6,119.05)
DRV_1_IN2: U9A.40 U11.24 | length 69.7
  Top Layer w0.2: U11.24@19.225,80.195 19.28,80.25 20.75,80.25 v2(21.25,80.75) ; v2@59.7,119.65 59.728,119.623 U9A.40@63.45,119.623
  Bottom Layer w0.2: v2(21.25,80.75) 22,81.5 22,97 44.65,119.65 56.316,119.65 56.341,119.675 57.675,119.675 57.725,119.625 59.059,119.625 59.084,119.65 59.625,119.65 v2(59.7,119.575)
DRV_1_IN3: U9A.39 U11.25 | length 69.5
  Top Layer w0.2: U11.25@19.225,81.465 19.374,81.316 20.816,81.316 21.25,81.75 v2(21.25,82.25) ; v2(58.8,120.25) v2@58.804,120.254 ; v2@58.804,120.204 U9A.39@63.446,120.204 ; U9A.39@63.446,120.254 U9A.39@63.45,120.258
  Bottom Layer w0.2: v2(21.25,82.25) 21.25,97.25 44.25,120.25 v2(58.8,120.25)
DRV_1_IN4: U9A.38 U11.26 | length 68.5
  Top Layer w0.2: U11.26@19.225,82.735 20.383,82.735 20.5,82.852 v2(20.5,84.75) ; v2(59.7,120.85) 59.721,120.871 63.429,120.871 U9A.38@63.45,120.893
  Bottom Layer w0.2: v2(20.5,84.75) 20.5,97.25 44.1,120.85 44.151,120.901 59.649,120.901 v2(59.7,120.85)
DRV_1_IPROPI_1: R27A.2 U9A.32 U11.7 | length 100.4
  Top Layer w0.2: v2(6.8,69.95) 6.886,69.864 7.096,69.864 9.027,67.933 9.027,67.263 U11.7@9.085,67.205 ; v3(36.3,118.95) 49.051,118.95 55.25,125.149 55.25,127.824 55.426,128 R27A.2@56.25,128 57.25,128 60.548,124.703 U9A.32@63.45,124.703
  Bottom Layer w0.2: v2(6.8,69.95) 5,71.75 5,76.75 10.4,82.15 10.4,93.05 v3(36.3,118.95)
DRV_1_IPROPI_2: R26A.2 U9A.31 U11.6 | length 103
  Top Layer w0.2: v2(5.9,69.85) 7.815,67.935 U11.6@7.815,67.205 ; v3(36.3,119.85) 43.041,119.85 43.146,119.955 48.705,119.955 53.185,124.435 53.185,127.883 53.302,128 R26A.2@54.25,128 54.25,129.331 54.367,129.448 56.552,129.448 60.662,125.338 U9A.31@63.45,125.338
  Bottom Layer w0.2: v2(5.9,69.85) 5.8,69.85 4.3,71.35 4.3,76.95 9.8,82.45 9.8,93.35 v3(36.3,119.85)
DRV_1_IPROPI_3: R25A.2 U9A.30 U11.5 | length 104.1
  Top Layer w0.2: v2(4.4,69.75) 4.442,69.708 4.842,69.708 6.617,67.933 6.617,67.072 U11.5@6.545,67 ; v3(36.317,120.733) 36.334,120.75 48,120.75 51.25,124 51.25,127.824 51.426,128 R25A.2@52.25,128 52.25,128.824 53.274,129.848 56.811,129.848 60.686,125.973 U9A.30@63.45,125.973
  Bottom Layer w0.2: v2(4.4,69.75) 4.3,69.75 3.6,70.45 3.6,77.05 9.3,82.75 9.3,93.75 36.283,120.733 v3(36.317,120.733)
DRV_1_IPROPI_4: R24A.2 U9A.29 U11.4 | length 104.3
  Top Layer w0.2: v2(2.9,69.85) 3.4,69.85 5.275,67.975 U11.4@5.275,67.205 ; v3@36.3,121.55 36.35,121.5 45.25,121.5 49,125.25 49,127.883 49.117,128 R24A.2@50.25,128 50.25,129.324 51.426,130.5 57,130.5 60.892,126.608 U9A.29@63.45,126.608
  Bottom Layer w0.2: v2(2.9,69.85) 2.9,77.25 8.9,83.25 8.9,94.2 v3(36.3,121.6)
DRV_2_EN1: U9B.37 U10.16 | length 55.2
  Top Layer w0.3: U10.16@18.3,54.867 18.3,55.724 19.576,57 26.892,57 v2(26.946,57.054) ; v2(58,71.246) 58.009,71.237 63.441,71.237 U9B.37@63.45,71.228
  Bottom Layer w0.3: v2(26.946,57.054) 27.041,57.054 27.213,57.226 27.337,57.226 30.112,60 51.457,60 58,66.543 v2(58,71.246)
DRV_2_EN2: U9B.36 U10.17 | length 56.9
  Top Layer w0.3: U10.17@17.65,54.867 17.653,54.87 17.653,56.053 19.469,57.869 26.989,57.869 v2(27.02,57.901) ; v2(57.25,71.995) 58.755,71.995 58.887,71.863 U9B.36@63.45,71.863
  Bottom Layer w0.3: v2(27.02,57.901) 27.087,57.968 27.372,57.968 29.905,60.5 51.25,60.5 57.25,66.5 v2(57.25,71.995)
DRV_2_EN3: U9B.35 U10.18 | length 58.5
  Top Layer w0.3: U10.18@17,54.867 17,56.3 19.475,58.775 v2(27.225,58.775) ; v2(56.5,72.746) 56.505,72.75 58.75,72.75 59.002,72.498 U9B.35@63.45,72.498
  Bottom Layer w0.3: v2(27.225,58.775) 27.225,58.868 29.507,61.15 51.1,61.15 56.5,66.55 v2(56.5,72.746)
DRV_2_EN4: U9B.34 U10.19 | length 59.9
  Top Layer w0.3: U10.19@16.35,54.867 16.35,56.55 19.387,59.587 v2(26.973,59.587) ; v2(55.75,73.496) 58.712,73.496 59.082,73.125 61.076,73.125 61.083,73.133 U9B.34@63.45,73.133
  Bottom Layer w0.3: v2(26.973,59.587) 29.136,61.75 50.8,61.75 55.75,66.7 v2(55.75,73.496)
DRV_2_IN1: U9B.41 U10.12 | length 51.8
  Top Layer w0.3: U10.12@19.867,52.65 23.055,52.65 24.152,53.747 v2(27.003,53.747) ; v2(60.887,68.683) 60.89,68.685 63.448,68.685 U9B.41@63.45,68.688
  Bottom Layer w0.3: v2(27.003,53.747) 31.207,57.95 52.7,57.95 61,66.25 61,67.758 60.887,67.871 v2(60.887,68.683)
DRV_2_IN2: U9B.40 U10.13 | length 52
  Top Layer w0.3: U10.13@19.867,53.3 22.5,53.3 23.832,54.632 26.568,54.632 v2(26.6,54.6) ; v2(60.25,69.246) 60.345,69.246 60.457,69.358 63.415,69.358 U9B.40@63.45,69.323
  Bottom Layer w0.3: v2(26.6,54.6) 26.667,54.667 27.217,54.667 31,58.45 31.15,58.45 31.2,58.5 52.5,58.5 60.206,66.206 60.206,69.202 v2(60.25,69.246)
DRV_2_IN3: U9B.39 U10.14 | length 52.1
  Top Layer w0.3: U10.14@19.867,53.95 21.95,53.95 23.446,55.446 v2(27,55.446) ; v2(59.5,69.746) 59.595,69.746 59.807,69.958 U9B.39@63.45,69.958
  Bottom Layer w0.3: v2(27,55.446) 30.554,59 52,59 59.5,66.5 v2(59.5,69.746)
DRV_2_IN4: U9B.38 U10.15 | length 53.4
  Top Layer w0.3: U10.15@18.95,54.867 21.867,54.867 23.223,56.223 v2(26.655,56.223) ; v2(58.75,70.496) 58.799,70.544 63.401,70.544 U9B.38@63.45,70.593
  Bottom Layer w0.3: v2(26.655,56.223) 26.722,56.29 27.137,56.29 30.347,59.5 51.75,59.5 58.75,66.5 v2(58.75,70.496)
DRV_MODEA: JP1A.2 JP2A.2 U9A.28 | length 16.7
  Top Layer w0.3: JP1A.2@60.525,135.225 60.525,134.176 60.751,133.95 64,133.95 64.5,134.45 JP2A.2@64.5,135.25 ; v2(61.058,127.543) 61.153,127.543 61.454,127.243 U9A.28@63.45,127.243
  Bottom Layer w0.3: v2(61.058,127.543) 60.963,127.543 60.626,127.881 60.512,127.881 60.3,128.093 60.3,132.35 61.9,133.95 v2(62.5,133.95)
DRV_MODEB: JP1B.2 JP2B.2 U9B.28 | length 23.6
  Top Layer w0.3: v1(58.5,77.75) 60,77.75 60.758,76.993 63.4,76.993 U9B.28@63.45,76.943
  Bottom Layer w0.4: v1(58.5,77.75) 58.5,79.25 62.098,82.848 69.298,82.848 JP1B.2@70.075,83.625 71.375,83.625 72.475,84.725 JP2B.2@73,84.725
DRVs_OCPM: U9A.27 U9B.27 U12.8 | length 104
  Top Layer w0.2: U12.8@36,92.85 v2(38.1,92.85) ; v2(54.7,131.95) 56.4,131.95 60.1,128.25 61.276,128.25 61.649,127.878 U9A.27@63.45,127.878
  Top Layer w0.25: v2(48.326,92.15) 48.326,84.243 54.019,78.55 60.453,78.55 61.425,77.578 U9B.27@63.45,77.578
  Bottom Layer w0.2: v2(48.326,92.15) 48.24,92.064 38.886,92.064 v2(38.1,92.85) 38.1,95.3 41.275,98.475 41.275,98.54 42.11,99.375 42.575,99.375 51.25,108.05 51.25,115.5 54,118.25 60.583,118.25 60.7,118.367 60.7,123.577 60.7,125.95 v2(54.7,131.95)
DVR_1_VM: C32A.1 C33A.2 C34A.1 C36A.1 C56A.1 U9A.2 U9A.11 U9A.12 U9A.21 U13A.6 U14A.6 | length 4.7
  Top Layer w0.4: U9A.21@70.95,129.783 v1@72.483,129.783
  Bottom Layer w0.4: C34A.1@71.162,129.854 71.189,129.827 72.473,129.827 v1(72.5,129.8) ; C36A.1@71.325,118.35 72.578,118.35 72.903,118.025 v1(73.025,118.025)
  other v1: 51.75,105.75 61,106.25 63,106.25 60,107.25 62,107.25 49.75,107.575 61,108.25 63,108.25 60,109.25 62,109.25 64,109.25 73.075,117.025 72.998,123.418 72.2,123.85 72.845,124.423
  other v2: 53.8,105.55 57.4,105.55 54,109.65 57.5,109.65
DVR_2_VM: C32B.1 C33B.2 C34B.1 C36B.1 C56B.1 U9B.2 U9B.11 U9B.12 U9B.21 U13B.6 U14B.6 | length 5.3
  Top Layer w0.4: U9B.21@70.95,79.483 72.483,79.483 v1(72.5,79.5) ; C33B.2@73.01,65.739 C33B.2@73.318,65.431
  Bottom Layer w0.4: C34B.1@71.25,79.5 v1(72.5,79.5) ; C36B.1@71.301,68.11 71.499,67.911 71.609,68.02 71.609,68.055 72.573,68.055 72.903,67.725 v1(73.025,67.725)
  other v1: 73.075,66.725 73.1,73.1 72.2,73.55 72.813,74.152 50,89.25 52,89.25 61,89.25 51,90.25 60,90.25 62,90.25 71.25,91 72.75,91 50,91.25 52,91.25 61,91.25 51,92.25 60,92.25 62,92.25
  other v2: 53.873,88.503 57.619,88.503 52.856,88.523 52.829,92.608 53.8,92.625 57.468,92.608
EN: TP1.1 U5.1 | length 11.2
  Top Layer w0.2: TP1.1@42.25,75.5 42.25,73.75 42.5,73.5 46.483,73.5 46.6,73.383 46.6,70.06 46.382,69.842 46.367,69.842 46.25,69.725 U5.1@46.25,68.6
EXTERNAL_I2C_SCL: D22.6 J_EXT_I1.3 R49.1 U11.34 | length 27.8
  Top Layer w0.3: v2(7.274,87.226) 7.323,87.226 9.025,85.524 9.025,84.56 U11.34@9.085,84.5
  Bottom Layer w0.3: J_EXT_I1.3@1.5,105.46 1.54,105.5 3.25,105.5 4.45,104.3 ; R49.1@3.75,102.5 3.75,103.6 4.45,104.3 ; v2(7.274,87.226) 6.612,87.888 D22.6@6.612,93.3 5.7,93.3 5.5,93.5 5.5,103.25 4.45,104.3
EXTERNAL_I2C_SDA: D22.4 J_EXT_I1.2 R48.1 U11.33 | length 30.8
  Top Layer w0.3: v2(8.275,88.05) 8.3,88.05 10.355,85.995 U11.33@10.355,84.5
  Bottom Layer w0.3: J_EXT_I1.2@1.5,108 1.54,108.04 4,108.04 ; R48.1@4,108.888 4,108.04 ; D22.4@6.621,95.2 6.621,106.379 4.96,108.04 4,108.04 ; D22.4@6.75,95.2 8.024,95.2 8.275,94.949 v2(8.275,88.05)
EXTERNAL_RXD0: D22.3 J_UART1.2 U11.36 | length 15
  Top Layer w0.3: v2(6.5,86.25) 6.5,84.545 U11.36@6.545,84.5
  Bottom Layer w0.3: J_UART1.2@1.5,95.79 2.71,95.79 3,95.5 3,95.376 3.047,95.329 3.759,95.329 D22.3@3.888,95.2 4.674,95.2 4.85,95.024 4.85,88.4 6.5,86.75 v2(6.5,86.25)
EXTERNAL_SPI_CS0: D23.6 J_SPI1.3 U11.18 | length 38
  Top Layer w0.2: D23.6@12.475,60.15 12.5,60.175 v2(12.5,61.5) ; v2(15,72) 16.561,72 17.136,72.575 U11.18@19.225,72.575
  Bottom Layer w0.2: v2(15,72) 15,70.5 12.5,68 v2(12.5,61.5) 13.2,62.2 13.25,62.2 13.75,62.7 13.75,65.5 18.25,70 24.54,70 J_SPI1.3@27,72.46
EXTERNAL_SPI_CS1: D24.6 J_SPI1.7 U11.22 | length 13.5
  Top Layer w0.2: U11.22@19.225,77.655 19.332,77.548 v1(20.733,77.548)
  Bottom Layer w0.3: v1(20.733,77.548) 21.673,77.548 23,78.875 24.075,78.875 24.45,78.5 ; D24.6@24.45,76.975 24.45,78.5 ; J_SPI1.7@27,82.62 25.645,82.62 24.45,81.425 24.45,78.5
EXTERNAL_SPI_MISO: D24.4 J_SPI1.6 U11.21 | length 11.9
  Top Layer w0.2: U11.21@19.225,76.385 19.259,76.419 v1(20.704,76.419)
  Bottom Layer w0.3: v1(20.704,76.419) 20.723,76.419 21.155,76.851 D24.4@22.466,76.851 ; D24.4@22.55,76.975 22.679,76.846 22.679,76.476 23.105,76.05 24.875,76.05 25.5,76.675 25.5,79.6 25.9,80 26.92,80 J_SPI1.6@27,80.08
EXTERNAL_SPI_MOSI: D24.1 J_SPI1.4 U11.19 | length 11.1
  Top Layer w0.2: U11.19@19.225,73.845 19.361,73.981 v1(20.704,73.981)
  Bottom Layer w0.3: v1(20.704,73.981) 20.704,72.551 20.88,72.375 23.625,72.375 23.698,72.448 23.791,72.448 24.202,72.859 24.202,72.952 24.45,73.2 D24.1@24.45,74.25 25.946,74.25 26.696,75 J_SPI1.4@27,75
EXTERNAL_SPI_SCK: D24.3 J_SPI1.5 U11.20 | length 10.1
  Top Layer w0.2: U11.20@19.225,75.115 19.231,75.109 v1(20.675,75.109)
  Bottom Layer w0.3: v1(20.675,75.109) 20.711,75.073 21.277,75.073 21.997,74.353 22.447,74.353 D24.3@22.55,74.25 22.524,74.276 22.524,75.01 22.889,75.375 25.075,75.375 27,77.3 J_SPI1.5@27,77.54
EXTERNAL_TXD0: D22.1 J_UART1.3 U11.37 | length 11.8
  Top Layer w0.3: v2(5.25,86.25) 5.275,86.225 U11.37@5.275,84.5
  Bottom Layer w0.3: J_UART1.3@1.5,93.25 1.525,93.275 3.863,93.275 D22.1@3.888,93.3 4,93.188 4,87.5 v2(5.25,86.25)
FB: C20.1 R10.1 R11.2 U5.2 | length 6.1
  Top Layer w0.2: R10.1@43.75,72.65 C20.1@45.75,72.65 R11.2@45.75,70.65 U5.2@45.75,68.6